# Altium PCB schematic.PcbDoc
Units mil, origin at the board's own origin, x right, y up, seen from the top; angles counter-clockwise.
Board outline 9110.03 x 5030.03 mil, 2 copper layers (Top Layer, Bottom Layer); 45 components, 45 nets, 180 pads, 0 vias.
Unrouted connection lines stored in the file: 37.
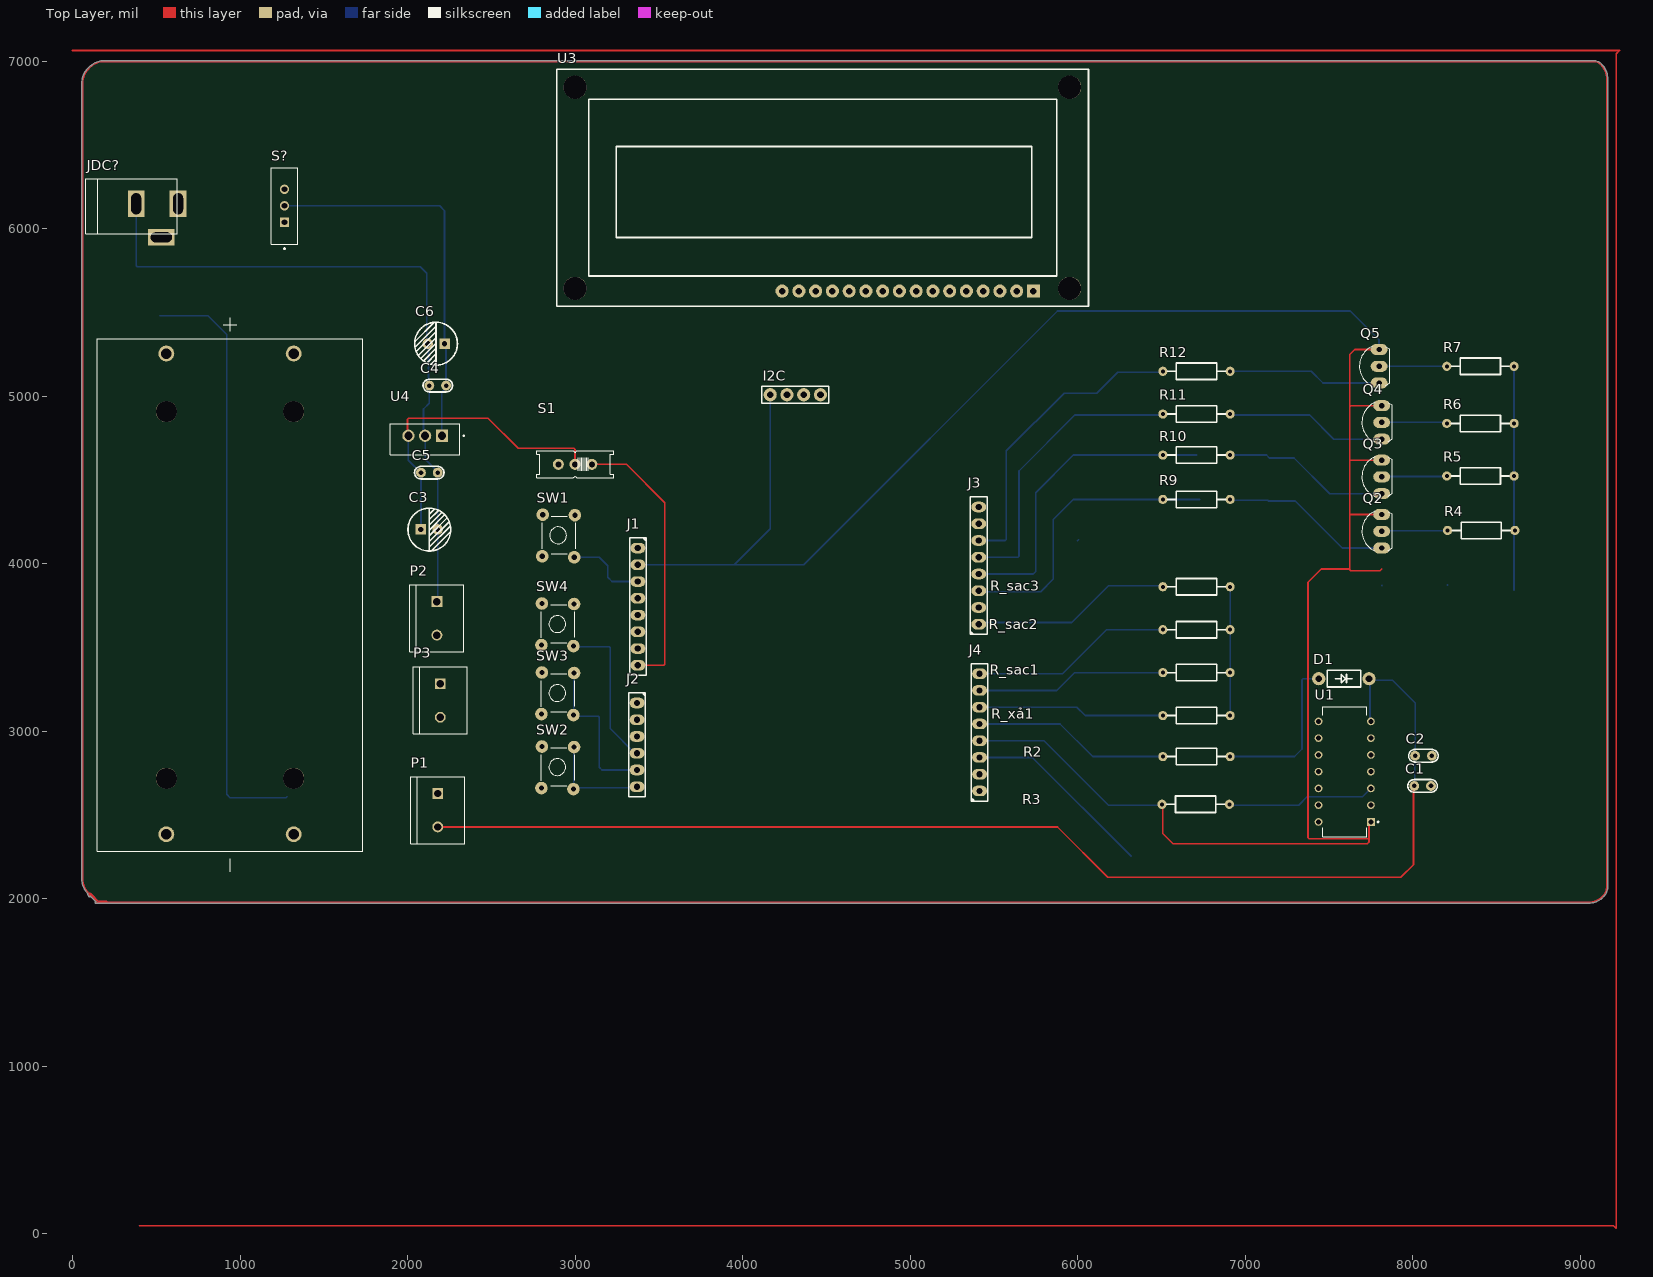
[diagram p0: Top Layer view]
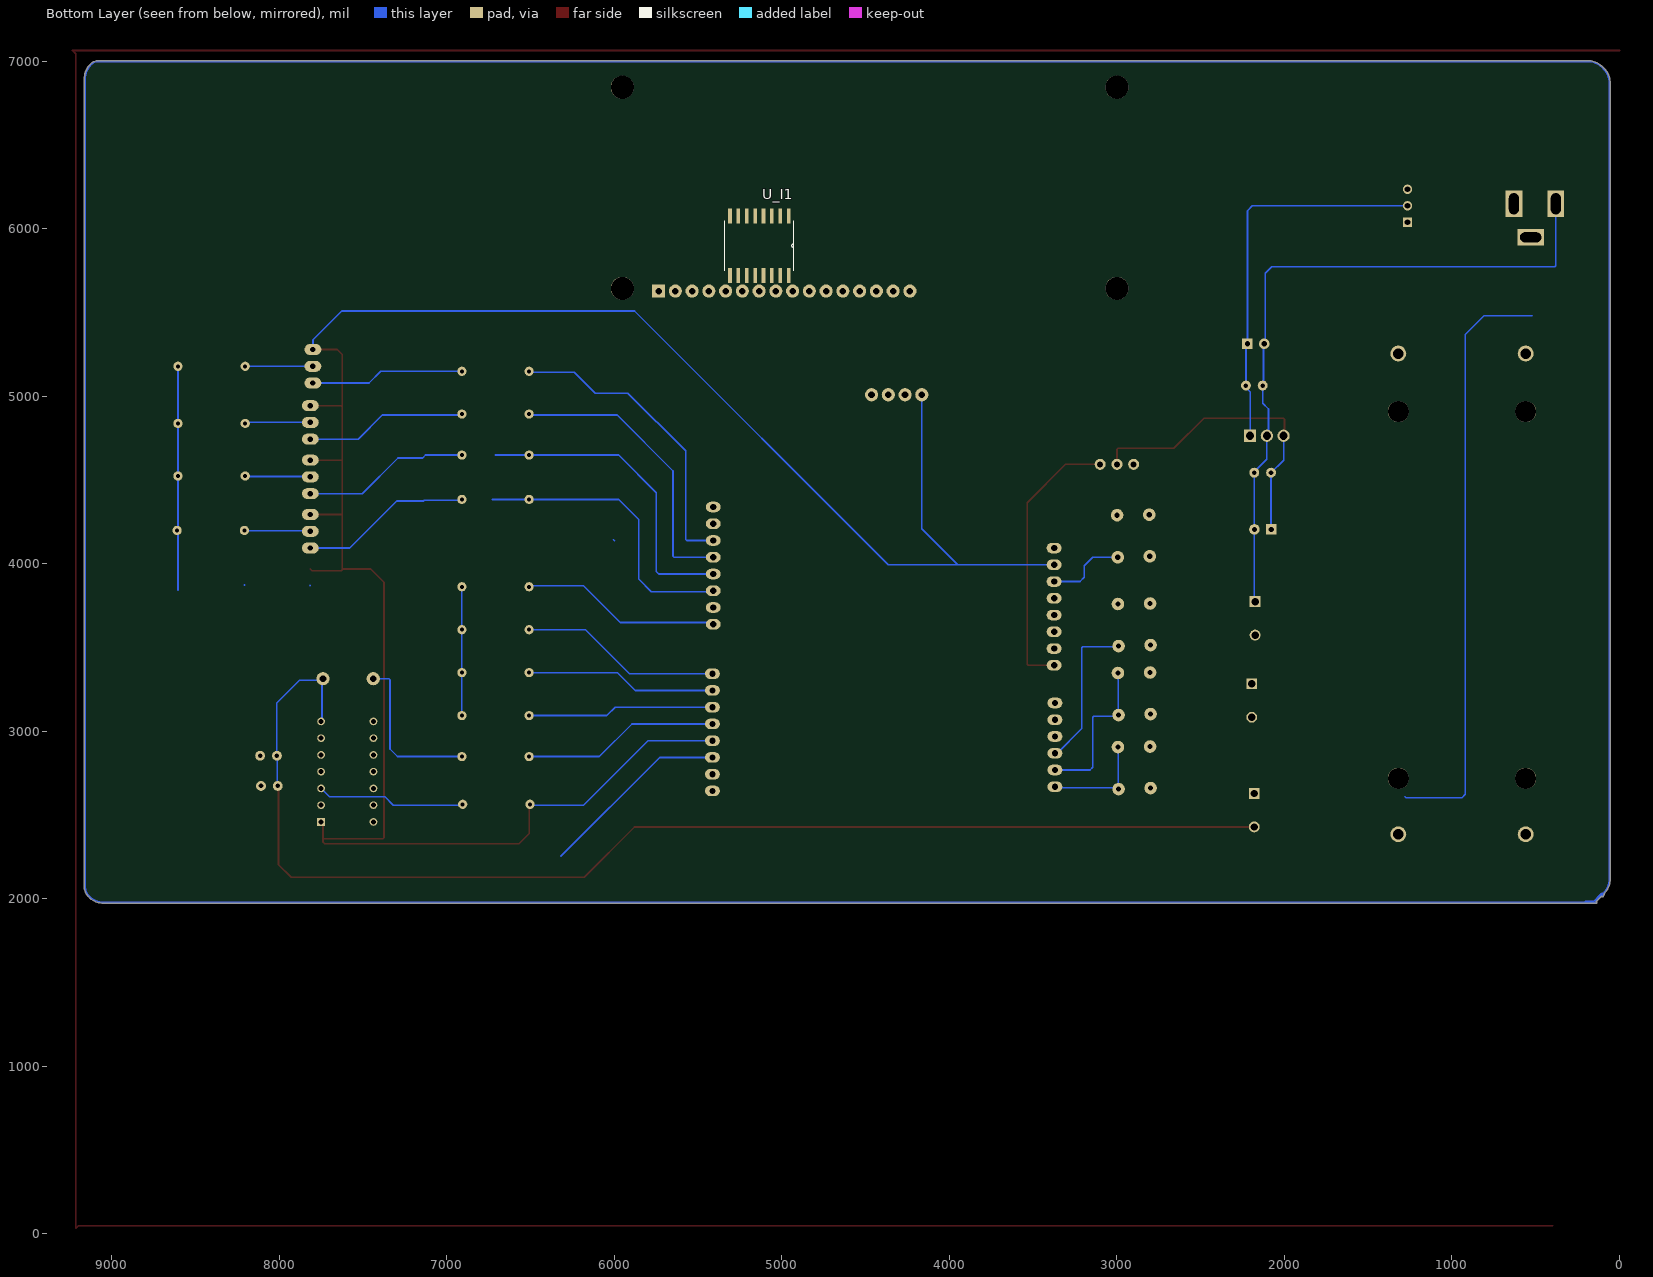
[diagram p1: Bottom Layer view, seen from below]

## Layer stack, top to bottom
Top Solder: solder mask 0.4, Solder Resist, Dk 3.5
Top Layer: signal copper 1.4
Dielectric 1: dielectric 12.6, FR-4, Dk 4.8
Bottom Layer: signal copper 1.4
Bottom Solder: solder mask 0.4, Solder Resist, Dk 3.5

## Board outline
90.42,2032.51 cw(c180.71,2120) 54.98,2120 54.98,6870 cw(c180.71,6870) 91.81,6958.9 101.1,6968.19 cw(c190,6879.29) 190,7005.02 9077.22,7005.02 cw(c9077.22,6932.93) 9128.19,6983.9 cw(c9039.29,6895) 9165.01,6895 9165.01,2074.85 cw(c9075.86,2074.85) 9138.9,2011.81 cw(c9050,2100.71) 9050,1974.98 140,1974.98 cw(c140,1980) 139.61,1985 cw(c140,1990) 136.44,1986.47 136.45,1986.45 108.53,2014.38 ccw(c112.07,2017.93) 108.54,2014.37 108.52,2014.38 cw(c129.14,2035) 107.14,2015.87 cw(c102.43,2017.57) 98.88,2014.03 cw(c119.5,2034.64)

## Design rules (kind name [scope] priority, off if disabled: settings)
Clearance [All] p1: gap=20
PolygonConnect [All] p1: connectstyle=Relief reliefconductorwidth=10 reliefentries=4 polygonreliefangle="90 Angle" airgapwidth=10
RoomDefinition schematic [InComponentClass('schematic')] p1: confinementstyle=ConfineIn formatcopy=TRUE lockcomponents=FALSE outline 9280,95 11730,95 11730,725 9280,725
RoutingVias [All] p1: holewidth=30 width=35 viastyle="Through Hole" minholewidth=15 minwidth=25 maxholewidth=28 maxwidth=50
SolderMaskExpansion [All] p1: expansion=4
Width [All] p1: maxlimit=30 minlimit=10 preferedwidth=10
30 further rules are at their usual default settings.

## Components (designator, comment, footprint, x,y, rotation, side; value= is the part's Value field where it differs from the comment)
C1 "103" "tu gom" 8060,2675 r0 top
C2 "103" "tu gom" 8065,2855 r0 top
C3 "1nF" "tu hoa 6.5mm" 2130,4205 r0 top
C4 "104" "tu gom" 2180,5065 r180 top
C5 "104" "tu gom" 2130,4545 r0 top
C6 "1nF" "tu hoa 6.5mm" 2170,5315 r180 top
D1 "1N4001" 1N4007 7590,3315 r270 top
I2C "6 Pin" MALE_4 4315.28,5007.5 r90 top
J1 "8 Pin" "SAMTEC SSW-108-03-T-S" 3375,3745 r270 top
J2 "6 Pin" "SAMTEC SSW-106-03-T-S" 3370,2920 r270 top
J3 "8 Pin" "SAMTEC SSW-108-03-T-S" 5410,3990 r90 top
J4 "8 Pin" "SAMTEC SSW-108-03-T-S" 5415,2995 r90 top
JDC? "Jack DC" DC-IN 505,6050 r0 top
P1 "INPUT_IND" TE_282837-2 2180,2530 r270 top
P2 "INPUT_RES" TE_282837-2 2175,3675 r270 top
P3 "INPUT- CAP" TE_282837-2 2195,3185 r270 top
Q2 "A1015" QTO-92 7815,4195 r90 top
Q3 "A1015" QTO-92 7815,4520 r90 top
Q4 "A1015" QTO-92 7815,4845 r90 top
Q5 "A1015" QTO-92 7800,5180 r90 top
R2 "150Ω" "Tro Vach 1/4W" 6710,2850 r180 top
R3 "150Ω" "Tro Vach 1/4W" 6705,2565 r180 top (schematic designator R2)
R4 "100 KΩ" "Tro Vach 1/4W" 8410,4200 r180 top
R5 "10 KΩ" "Tro Vach 1/4W" 8405,4525 r180 top
R6 "1KΩ" "Tro Vach 1/4W" 8405,4838.75 r180 top
R7 "150 Ω" "Tro Vach 1/4W" 8405,5180 r180 top
R9 "4.7KΩ" "Tro Vach 1/4W" 6710,4385 r0 top
R10 "4.7KΩ" "Tro Vach 1/4W" 6710,4650 r0 top
R11 "4.7KΩ" "Tro Vach 1/4W" 6710,4895 r0 top
R12 "4.7KΩ" "Tro Vach 1/4W" 6710,5150 r0 top
R_sac1 "10KΩ" "Tro Vach 1/4W" 6710,3351.25 r180 top
R_sac2 "100KΩ" "Tro Vach 1/4W" 6710,3607.5 r180 top
R_sac3 "1MΩ" "Tro Vach 1/4W" 6710,3863.75 r180 top
R_xả1 "220Ω" "Tro Vach 1/4W" 6710,3095 r180 top (schematic designator R_x?1)
S1 "EG1218" EG1218 3000,4595 r180 top
S? "SW" SW_MINI-SPDT-SW 1265,6138.43 r90 top
SW1 "Nut Nhan 4 Chan" SW4 2804,4046 r90 top
SW2 "Nut Nhan 4 Chan" SW4 2799,2662 r90 top
SW3 "Nut Nhan 4 Chan" SW4 2799,3103.9 r90 top
SW4 "Nut Nhan 4 Chan" SW4 2799,3515.8 r90 top
U1 "LM339" DIP794W45P254L1969H508Q14 7595,2760 r180 top
U3 "DISPLAY_LCD_16_2" DISPLAY_LCD_16_2 4484.91,6249 r180 top
U4 "LM7805" TO254P1054X470X2600-3 2205,4765 r180 top
U_I1 "PCF8574AT/3,518" SOIC127P1032X265-16N 5135,5900 r270 bottom
? "BK-18650-PC4" BAT_BK-18650-PC4 940,3815 r270 top

## Footprints (in the part's own frame and the unit in brackets; to place one, negate y for a bottom-side part, rotate by r counter-clockwise, add the part's x,y. Pads: shape width x height; smd on the part's side, far side on the other; paste and mask are expansions set on the pad)
1N4007 [mm] "Rectifier Diode 1000V 1A DO-41"
  round 2 hole 1: 1(0,-3.81) 2(0,3.81)
  silkscreen extent -1.27,-2.54 1.27,2.54, body extent -1.35,-4.19 1.35,4.29, height 3.35
BAT_BK-18650-PC4 [mm]
  round 2.4 hole 1.6: 1+(-36.6,9.65) 1-(36.3,9.65) 2+(-36.6,-9.65) 2-(36.3,-9.65)
  round 3.2 hole 3.2 unplated: ""(-27.81,-9.65) ""(-27.81,9.65) ""(27.81,-9.65) ""(27.81,9.65)
  silkscreen extent -42,-20.11 42,20.11
DC-IN [mil] "Jac DC input"
  rect 100x160 hole 59.06 slot 125.98 at 90 deg: 1(125,100) 2(-125,100)
  rect 160x100 hole 59.06 slot 125.98 at 0 deg: 3(25,-100)
  silkscreen extent -425,-80 120,250, body extent -410,-105 134,269, height 434
DIP794W45P254L1969H508Q14 [mm]
  rect 1.17x1.17 / inner round 1.17 / far side rect 1.17x1.17 hole 0.77: 1(-3.97,7.62)
  round 1.17 hole 0.77: 2(-3.97,5.08) 3(-3.97,2.54) 4(-3.97,0) 5(-3.97,-2.54) 6(-3.97,-5.08) 7(-3.97,-7.62) 8(3.97,-7.62) 9(3.97,-5.08) 10(3.97,-2.54) 11(3.97,0) 12(3.97,2.54) 13(3.97,5.08) 14(3.97,7.62)
  silkscreen extent -5.15,-9.84 3.3,9.84, body extent -4.1,-9.65 4.1,9.65, height 5.08
DISPLAY_LCD_16_2 [mm]
  rect 2x2 hole 1: 1(-31.782,15.743)
  round 2 hole 1: 2(-29.242,15.743) 3(-26.702,15.743) 4(-24.162,15.743) 5(-21.622,15.743) 6(-19.082,15.743) 7(-16.542,15.743) 8(-14.002,15.743) 9(-11.462,15.743) 10(-8.922,15.743) 11(-6.382,15.743) 12(-3.842,15.743) 13(-1.302,15.743) 14(1.238,15.743) 15(3.778,15.743) 16(6.318,15.743)
  round 3.5 hole 3.5 unplated: ""(-37.283,-15.158) ""(-37.283,15.342) ""(37.717,-15.158) ""(37.717,15.342)
  silkscreen extent -40.13,-17.91 40.51,18.03, body extent -40.13,-17.97 40.57,18.03, height 12
EG1218 [mil]
  round 66 hole 35.43: O(-100,0) P(0,0) S(100,0)
  silkscreen extent -230,-80 230,80, body extent -228,-276 228,201, height 79
MALE_4 [mm]
  round 2 hole 1: 1(0.064,-3.803) 2(0.064,-1.263) 3(0.063,1.277) 4(0.063,3.817)
  silkscreen extent -1.21,-5.07 1.33,5.08, body extent -1.14,-5.08 1.26,5.08, height 8.36
QTO-92 [mil] "TO-92"
  oval 66x100 hole 32: 1(-100,0) 2(0,0) 3(100,0)
  silkscreen extent -117,-65 120,118, body extent -109,-66 109,95, height 245
"SAMTEC SSW-106-03-T-S" [mm]
  oval 1.6x2.25 hole 0.95: 1(-6.35,0) 2(-3.81,0) 3(-1.27,0) 4(1.27,0) 5(3.81,0) 6(6.35,0)
  silkscreen extent -7.88,-1.27 7.88,1.27, body extent -7.87,-1.21 7.87,1.21, height 8.51
"SAMTEC SSW-108-03-T-S" [mm]
  oval 1.6x2.25 hole 0.95: 1(-8.89,0) 2(-6.35,0) 3(-3.81,0) 4(-1.27,0) 5(1.27,0) 6(3.81,0) 7(6.35,0) 8(8.89,0)
  silkscreen extent -10.42,-1.27 10.42,1.27, body extent -10.41,-1.21 10.41,1.21, height 8.51
SOIC127P1032X265-16N [mil]
  rect 90x22 smd: 1(-178,175) 2(-178,125) 3(-178,75) 4(-178,25) 5(-178,-25) 6(-178,-75) 7(-178,-125) 8(-178,-175) 9(178,-175) 10(178,-125) 11(178,-75) 12(178,-25) 13(178,25) 14(178,75) 15(178,125) 16(178,175)
  silkscreen extent -150,-206 150,207
SW4 [mil] "SW button 4pin, 250 x250 mil"
  round 75 hole 31: 1(0,0) 2(245,-195) 3(248,-3) 4(-6,-191)
  silkscreen extent 15,-215 240,0, body extent -36,-220 276,24, height 276
SW_MINI-SPDT-SW [mm]
  rect 1.408x1.408 hole 0.9: 1(-2.5,0)
  round 1.408 hole 0.9: 2(0,0) 3(2.5,0)
  silkscreen extent -6.6,-2 5.8,2
TE_282837-2 [mm]
  rect 1.65x1.65 / inner round 1.65 / far side rect 1.65x1.65 hole 1.1: 1(-2.54,0)
  round 1.65 hole 1.1: 2(2.54,0)
  silkscreen extent -5.08,-4.1 5.08,4.1, body extent -5.68,-4.1 5.08,4.1, height 10
TO254P1054X470X2600-3 [mm]
  rect 1.86x1.86 / inner round 1.86 / far side rect 1.86x1.86 hole 1.24: 1(0,0)
  round 1.86 hole 1.24: 2(2.54,0) 3(5.08,0)
  silkscreen extent -3.41,-1.8 7.81,2.9, body extent -4.98,-4.45 4.98,0, height 15.75
"Tro Vach 1/4W" [mm]
  round 1.4 hole 0.6: 1(-5.1,0) 2(5.1,0)
  silkscreen extent -4.39,-1.25 4.42,1.25, body extent -5.38,-1.2 5.38,1.2, height 2.41
"tu gom" [mm] "Tu gom mini"
  round 1.5 hole 0.7: 1(-1.27,0) 2(1.27,0)
  silkscreen extent -2.25,-0.97 2.22,0.97, body extent -2.92,-0.85 2.92,0.85, height 6.12
"tu hoa 6.5mm" [mm]
  rect 1.6x1.6 hole 0.8: 1(-1.295,0.025)
  round 1.6 hole 0.8: 2(1.245,0.025)
  silkscreen extent -3.25,-3.25 3.25,3.25, body extent -3.15,-3.15 3.2,3.2, height 14.55

## Part data
C1 C2 C4 C5: library part "Tu gom 103 50V", "C?m"
C3 C6: library part "Tu Hoa 100uF 35V 6x8", "C?m"
D1: library part 1N4007, "Rectifier Diode 1000V 1A DO-41"
JDC?: library part Jac_DC, "C?m"
P1 P2 P3: library part 282837-2, "? ?°?·Ñ??µ?¼?½Ñ‹?µ ?º?»?µ?¼?¼?½Ñ‹?µ ?º?¾?»?¾?´?º?¸ ? ?¾?·?µÑ‚?º?° 2 ?¿?¾?»?¾?¶?µ?½?¸Ñ� 5,08 ?¼?¼ ?ŸÑ€?¸?¿?¾?¹ ?¿Ñ€Ñ�?¼?¾?¹ Ñ‡?µÑ€?µ?· ?¾Ñ‚?²?µÑ€Ñ�Ñ‚?¸?µ 13,5 ?� / ?º?¾?½Ñ‚?°?ºÑ‚"
Q2 Q3 Q4 Q5: "Dán"
R2 R3 R4 R5 R6 R7 R9 R10 R11 R12 R_sac1 R_sac2 R_sac3 R_xả1: library part "Res 2W", "C?m"
S1: "Slide Switch SPDT Through Hole"
S?: library part MINI-SPDT-SW, "Simple breadboard friendly SPDT slide switch. Rated at 30V/200mA with operating force of 250 +/-100gf."
SW1 SW2 SW3 SW4: "C?m"
U1: "Comparator Differential CMOS, MOS, Open-Collector, TTL 14-SOIC"
U3: "Display LCD 16x2 I2C."
U4: "IC REG LIN 5V 1A"
U_I1: "I/O Expander 8 I²C 100kHz 16-SO"
?: "Battery Holder (Open) 18650 2 Cell PC Pin"

## Nets (pads, with @x,y where several pads share a name; then routed paths per layer and width w, separated by ;. In a path a pad name is that pad's centre, name@x,y a point inside that pad or via, vN(x,y) a via of type N, cw(c..) or ccw(c..) an arc to the next point about the centre after c; other vN are vias at no path point)
A0: J2.1 P2.2 R4.1 R5.1 R6.1 R7.1 | length 1325
  Bottom Layer w10: 8605.79,3845 8605.79,4176.25 8605.79,4507.5 R6.1 R7.1@8605.79,5170
A1: J2.2 P3.2 R_sac1.1 R_sac2.1 R_sac3.1 R_xả1.1 | length 768.8
  Bottom Layer w10: R_xả1.1 R_sac1.1 R_sac2.1 R_sac3.1
A3: J2.4 SW4.2 SW4.4 | length 927.3
  Bottom Layer w10: SW4.4 2994.8,3505 3204.14,3505 3210,3499.14 3210,3017.2 3357.2,2870 J2.4
A4: J2.5 SW3.2 SW3.4 | length 943.2
  Bottom Layer w10: SW3.2 2992,3346.9 2992,3099.9 SW3.4 2997.9,3090 3139.14,3090 3145,3084.14 3145,2785.86 3160.86,2770 J2.5
A5: J2.6 SW2.2 SW2.4 | length 632.8
  Bottom Layer w10: SW2.4@2990,2666 SW2.4@2992,2668 ; SW2.2@2992,2915 SW2.4@2992,2668 ; SW2.4@2997,2663 3363,2663 J2.6 ; SW2.4@2997,2673 SW2.4@2992,2668
D3: I2C.4 J1.2 J4.4 Q2.3 Q3.3 Q4.3 Q5.3 R3.2 U1.1 | length 13508.6
  Top Layer w10: R3.2@6509.21,2560 6509.21,2390.79 6570,2330 7730,2330 7740,2340 7740,2360 ; U1.1 7740,2448.7 7740,2360 ; Q5.3 7655,5280 7625,5250 7625,4937.5 ; 7815,3970 7805,3960 7630.86,3960 7625,3965.86 7625,3970 ; Q2.3 7625,4295 ; Q3.3 7625,4620 ; Q4.3 7632.5,4945 7625,4937.5 ; 7625,3970 7455,3970 7375.63,3890.63 7375.63,2365.86 7381.49,2360 7740,2360 ; 7625,3970 7625,4295 ; 7625,4295 7625,4620 ; 7625,4620 7625,4937.5
  Bottom Layer w10: J1.2 3950,3995 ; I2C.4 4165,4210 3950,3995 ; J4.4 5800,2945 6185,2560 R3.2@6509.21,2560 ; Q5.3 7800,5338 7628,5510 5880,5510 4365,3995 3950,3995
D4: J4.5 R2.2 | length 1175
  Bottom Layer w10: J4.5 5895,3045 6090,2850 R2.2
D5: J4.6 R_xả1.2 | length 1114.9
  Bottom Layer w10: J4.6 5995,3145 6045,3095 R_xả1.2
D6: J4.7 R_sac1.2 | length 1138.2
  Bottom Layer w10: J4.7 5875,3245 5981.25,3351.25 R_sac1.2
D7: J4.8 R_sac2.2 | length 1202.9
  Bottom Layer w10: J4.8 5910,3345 6172.5,3607.5 R_sac2.2
D8: J3.1 R_sac3.2 | length 1197.1
  Bottom Layer w10: J3.1 5420,3650 5965,3650 6185,3870 6502.96,3870 R_sac3.2
D10: J3.3 R9.1 | length 1737.8
  Bottom Layer w10: J3.3 5415,3835 5780,3835 5855,3910 5855,4265 5975,4385 R9.1 ; R9.1@6529.21,4385 6730,4385
D11: J3.4 R10.1 | length 1869.4
  Bottom Layer w10: J3.4 5735,3940 5750,3955 5750,4425 5975,4650 R10.1 6710,4650
D12: J3.5 R11.1 | length 1751.6
  Bottom Layer w10: J3.5 5644.14,4040 5650,4045.86 5650,4555 5983.75,4888.75 6502.96,4888.75 R11.1
D13: J3.6 R12.1 | length 1843.8
  Top Layer w10: R12.1@6505,5155 6500,5150 R12.1
  Bottom Layer w10: J3.6 5569.14,4140 5575,4145.86 5575,4675 5920,5020 6115,5020 6240,5145 6504.21,5145 R12.1
GND: ?.2- C3.2 C4.2 C5.2 C6.2 I2C.3 J1.6 J1.7 JDC?.2 P1.1 P2.1 P3.1 SW1.1 SW1.3 SW2.1 SW2.3 SW3.1 SW3.3 SW4.1 SW4.3 U1.6 U1.12 U4.2 | length 4138.6
  Bottom Layer w10: JDC?.2 380,5780.86 385.86,5775 2075,5775 2115,5735 C6.2@2115,5314 ; C6.2 2125.5,5309.5 2125.5,5069.5 C4.2 2130,4960 2095,4925 2095,4775 U4.2 2105,4625 2180,4550 C5.2 2180,4225 2180,3780 P2.1
Net_1+: ?.1+ S?.3
Net_1-: ?.1- ?.2+ | length 3561.5
  Bottom Layer w10: 520.08,5480.94 809.06,5480.94 920,5370 920,2625 940,2605 1274.06,2605 1279.92,2610.87
NetC1_1: C1.1 C2.1 D1.2 P1.2 U1.7 | length 7536.2
  Top Layer w10: P1.2 5880,2430 6180,2130 7930,2130 8005,2205 8005,2670 C1.1
  Bottom Layer w10: D1.2 D1.2@7745.65,3309.35 ; U1.7 7745.65,3065.65 D1.2@7745.65,3309.35 ; C1.1 8012.5,2677.5 8012.5,2852.5 C2.1 8015,3170 7880,3305 7750,3305 D1.2@7745.65,3309.35
NetC1_2: C1.2
NetC2_2: C2.2
NetC3_1: C3.1 C5.1 S1.P U4.3 | length 1840.8
  Top Layer w10: U4.3 2000,4770 2000,4864.14 2005.86,4870 2480,4870 2660,4690 2994.14,4690 3000,4684.14 S1.P
  Bottom Layer w10: U4.3 2005,4620 C5.1 C3.1@2080,4225
NetC4_1: C4.1 C6.1 JDC?.1 S?.2 U4.1 | length 2326.4
  Bottom Layer w10: S?.2 2191.72,6138.43 2221,6109.14 C6.1 2230,5305 C4.1 2230,5052.03 2205,5027.03 U4.1
NetD1_1: D1.1 R2.1 | length 964.4
  Bottom Layer w10: R2.1 7295,2850 7340,2895 7340,3309.14 7345.86,3315 D1.1
NetI2C_5: J3.8
NetJ1_8: J1.8 S1.S | length 1658.6
  Top Layer w10: 3100,4595 3306.72,4595 3535.86,4365.86 3535,4365 3535,3400.86 3529.14,3395 J1.8
NetQ2_1: Q2.1 R9.2 | length 1024.3
  Bottom Layer w10: R9.2 6915.79,4380 7135,4380 7138.75,4376.25 7298.75,4376.25 7580,4095 Q2.1
NetQ2_2: Q2.2 R4.2 | length 396.3
  Bottom Layer w10: Q2.2 7817.5,4197.5 8206.71,4197.5 R4.2
NetQ3_1: Q3.1 R10.2 | length 999.5
  Bottom Layer w10: R10.2 7127.5,4650 7145,4632.5 7292.5,4632.5 7505,4420 Q3.1
NetQ3_2: Q3.2 R5.2 | length 396.6
  Bottom Layer w10: Q3.2@7818.75,4516.25 Q3.2 7817.5,4522.5 8201.71,4522.5 R5.2
NetQ4_1: Q4.1 R11.2 | length 966.3
  Bottom Layer w10: R11.2 6917.04,4888.75 7386.25,4888.75 7530,4745 Q4.1
NetQ4_2: Q4.2 R6.2 | length 391.8
  Bottom Layer w10: Q4.2 8197.96,4845 R6.2
NetQ5_1: Q5.1 R12.2 | length 918.2
  Bottom Layer w10: R12.2 7395,5150 7465,5080 Q5.1
NetQ5_2: Q5.2 R7.2 | length 404.2
  Bottom Layer w10: Q5.2 R7.2
NetR1_1: R3.1 U1.3 | length 881.9
  Bottom Layer w10: R3.1@6910.79,2560 7320,2560 7370,2610 7701.3,2610 U1.3
NetU3_4: U3.4 U_I1.4
NetU3_5: U3.5 U_I1.5
NetU3_6: U3.6 U_I1.6
NetU3_7: U3.7 U3.8 U3.9 U3.10
NetU3_11: U3.11 U_I1.9
NetU3_12: U3.12 U_I1.10
NetU3_13: U3.13 U_I1.11
NetU3_14: U3.14 U_I1.12
RESET: J1.3 SW1.2 SW1.4 | length 480.6
  Bottom Layer w10: SW1.4 3145,4040 3195,3990 3195,3920.86 3220.86,3895 J1.3
SDA: J3.7
pads on no net: ?. I2C.1 I2C.2 J1.1 J1.4 J1.5 J2.3 J3.2 J4.1 J4.2 J4.3 JDC?.3 S1.O S?.1 U1.2 U1.4 U1.5 U1.8 U1.9 U1.10 U1.11 U1.13 U1.14 U3. U3.1 U3.2 U3.3 U3.15 U3.16 U_I1.1 U_I1.2 U_I1.3 U_I1.7 U_I1.8 U_I1.13 U_I1.14 U_I1.15 U_I1.16
copper on no net: | length 26259.2
  Top Layer w10: 0,7065 9235,7065 9215,7045 9215,35 9200,50 400,50
  Bottom Layer w10: 5415,2845 5730,2845 6320,2255 ; 6000,4139.14 6005.86,4145 ; 7815,3870 7817.5,3872.5 ; 8206.71,3872.5 8209.21,3875

## Other copper
Multi-Layer:
  lines w10: 102.43,2017.57 cw(c119.5,2034.64) 95.36,2034.64 ; 105,2035 ccw(c129.14,2035) 112.07,2017.93 140,1990 140,1995 ; 140,1980 9050,1980 ccw(c9050,2100.71) 9135.36,2015.36 ccw(c9075.86,2074.85) 9160,2074.85 9160,6895 ccw(c9039.29,6895) 9124.64,6980.36 ccw(c9077.22,6932.93) 9077.22,7000 190,7000 ccw(c190,6879.29) 104.64,6964.64 95.36,6955.36 ccw(c180.71,6870) 60,6870 60,2120 ccw(c180.71,2120) 95.36,2034.64 ; 205,1985 155,1985 112.43,2027.57 ccw(c95.36,2010.5) 95.36,2034.64
  text "D13" at 5222.4,4110 h40
  text "D12" at 5222.4,4010 h40
  text "D11" at 5222.4,3910 h40
  text "D10" at 5222.4,3810 h40
  text "D9" at 5222.4,3710 h40
  text "D8" at 5222.4,3610 h40
  text "D7" at 5235,3320 h40
  text "D6" at 5235,3240 h40
  text "A0" at 3480,3215 h30
  text "D5" at 5235,3140 h40
  text "A1" at 3570,3090 h30
  text "D4" at 5235,3045 h40
  text "A2" at 3480.01,2955 h30
  text "D3" at 5235,2940 h40
  text "A3" at 3480.01,2850 h30
  text "D2" at 5235,2830 h40
  text "A4" at 3480.01,2745 h30
  text "D1" at 5245,2720 h40
  text "A5" at 3480.01,2640 h30
  text "D0" at 5245,2625 h40